# Altium PCB BLDC-2020_REMOTE_2544.PcbDoc (part 3 of 3)
Units mil, origin at the board's own origin, x right, y up, seen from the top; angles counter-clockwise.
Board outline 3000 x 7500 mil, 4 copper layers (Top Layer, GND, Power, Bottom Layer), stack 26.468 mil thick; 190 components, 136 nets, 675 pads, 43 vias.
Unrouted connection lines stored in the file: 286.
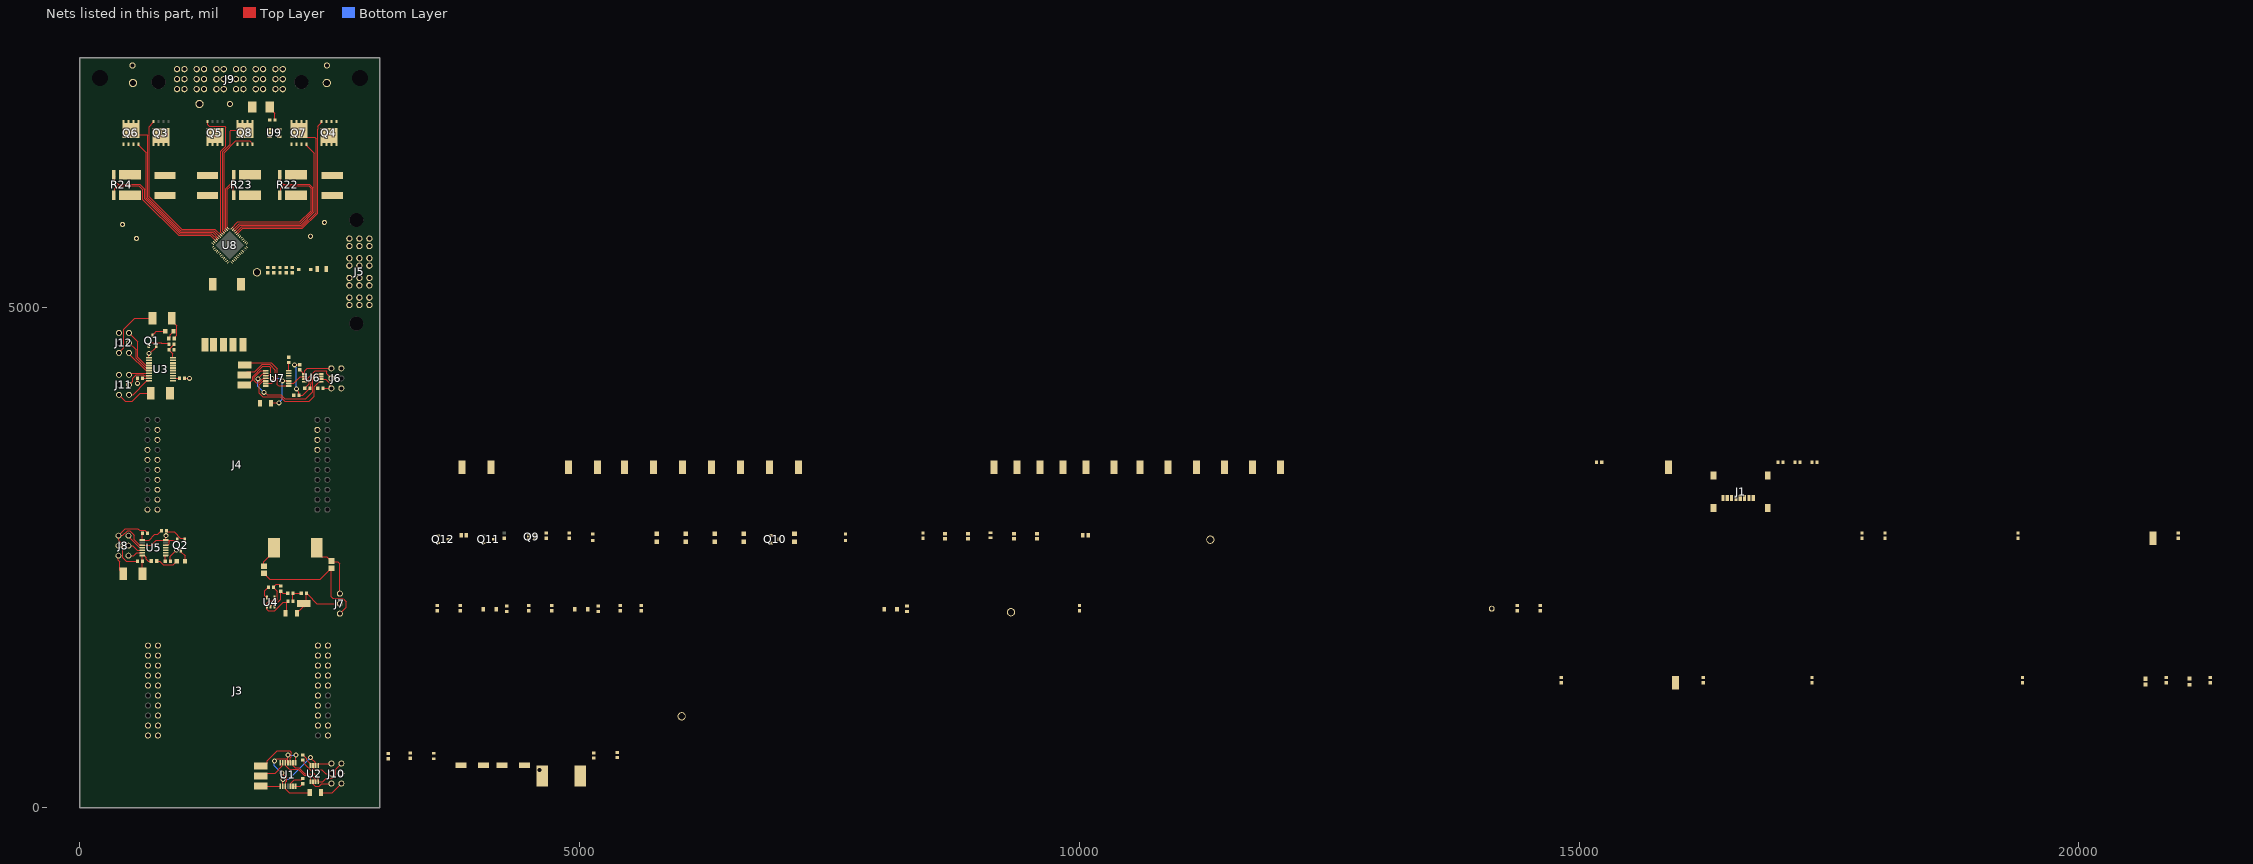
[diagram p3: the nets of this part, all layers, seen from the top]

## Part data (continued)
Q9: library part CMP-1259-00353-1, "N/P-Channel Trench MOSFET, 30 / -30 V, 400 / -220 mA, -55 to 150 degC, 6-Pin SOT666, Tape and Reel", Manufacturer="NXP Semiconductors", Automotive Qualified=Y, Channel Type=N/P, ComponentLink1Description="Manufacturer URL", ComponentLink1URL=http://www.nxp.com/, ComponentLink2Description=Datasheet, ComponentLink2URL=http://www.nxp.com/documents/data_sheet/NX3008CBKV.pdf, ComponentLink3Description="Package Specification", ComponentLink3URL=http://www.nxp.com/documents/outline_drawing/sot666_po.pdf, DatasheetVersion="Rev. 1", Mounting Technology="Surface Mount", PackageDescription="6-Pin Small Outline Transistor Package, Body 1.6 x 1.2 mm, Pitch 0.5 mm", PackageReference=SOT666, PackageVersion="06-03-16, 03/2006", Packing="Tape & Reel", PartNumber=NX3008CBKV,115
Q10: library part CMP-1058-00754-1, "Trench Power MOSFET, -20 V, Single P-Channel, 3-Pin SOT-23, Pb-Free, Tape and Reel", Manufacturer="On Semiconductor", Package Type=SOT-23-3, Channel Polarity="P Channel", Ciss Typ (pF)=675, ComponentLink1Description="Manufacturer URL", ComponentLink1URL=http://www.onsemi.com/, ComponentLink2Description=Datasheet, ComponentLink2URL=http://www.onsemi.cn/pub_link/Collateral/NTR4101P-D.PDF, ComponentLink3Description="Package Specification", ComponentLink3URL=http://www.onsemi.cn/pub_link/Collateral/318-08.PDF, Configuration=Single, Coss Typ (pF)=100, Crss Typ (pF)=75, DatasheetVersion="Rev. 9", ID Max (A)=3.2, Mounting Technology="Surface Mount", PackageDescription="3-Pin Small Outline Transistor, Body 2.92 x 1.3 mm, Pitch 0.95 mm", PackageReference=SOT-23-3-318-08, PackageVersion="Rev. AP, 11/2009", Packing="Tape and Reel", PartNumber=NTR4101PT1G, Qrr Typ (nC)=1008, RoHS=Pb-Free, V(BR)DSS Min (V)=20, VGS(th) Max (V)=1.2, VGS Max (V)=8
R1 R11 R17: library part CMP-2100-03681-1, "Chip Resistor, 0 Ohm, +/- 5%, -55 to 155 degC, 1206 (3216 Metric), RoHS, Tape and Reel", Case/Package=1206, Case Code (Metric)=3216, Manufacturer=Yageo, Max Operating Temperature=155degC, Max Power Dissipation=250mW, Min Operating Temperature=-55degC, Package Description="2-Pin Surface Mount Device, Body 3.1 x 1.6 mm", Package Quantity=5000, Package Reference=1206.0, Resistance=0mOhm, Temperature Coefficient=200ppm/degreesC, Tolerance=5%, Voltage Rating=200V, Case Code (Imperial)=1206, Composition=CarbonFilm, Contact Plating=Tin, Datasheet URL=http://www.yageo.com/documents/recent/PYu-RC_Group_51_RoHS_L_5.pdf, Datasheet Version="Rev. 5, 10/2016", Depth=1.6mm, Height=0.026inch, Lead Free=LeadFree, Length=3.1mm, Manufacturer URL=http://www.yageo.com/, Military Standard=Not, Number of Terminations=2, Packaging=TapeandReel, Power Rating=250mW, Radiation Hardening=No, REACH SVHC=Unknown, RoHSCompliant=true, Termination=SMD/SMT, Width=0.063inch
R2 R10 R34 R35 R37 R38: library part CMP-2000-01951-1, Manufacturer=Susumu, Part Number=RG1608N-910-B-T5
R3 R13 R39 R40 R41 R42: library part RR0816P-101-D, "RES SMD 100 OHM 0.5% 1/16W 0816", Case/Package=0603, Case Code (Metric)=1608, Manufacturer=Susumu, Max Operating Temperature=125°C, Max Power Dissipation=63mW, Min Operating Temperature=-55°C, Package Quantity=1, Resistance=100R, Temperature Coefficient=25ppm/°C, Tolerance=0.5%, Voltage Rating=75V, Case Code (Imperial)=0603, ComponentLink1Description=http://www.susumu.co.jp/common/pdf/n_catalog_partition05_en.pdf, ComponentLink1URL=http://www.susumu.co.jp/common/pdf/n_catalog_partition05_en.pdf, ComponentLink2Description=http://documents.rs-components.com/techlib://itc_doclist_GB.htm?stockno=3915191, ComponentLink2URL=http://documents.rs-components.com/techlib://itc_doclist_GB.htm?stockno=3915191, Composition="Thin Film", Depth=0.8mm, Height=0.4mm, Lead Free="Lead Free", Length=1.6mm, Manufacturer Part Number=RR0816P-101-D, Number of Pins=2, Number of Terminations=2, Packaging="Cut Tape", Power Rating=63mW, Pricing 1="1 = 0.11000, 10 = 0.09800, 100 = 0.03760, 1000 = 0.01654, 2500 = 0.01428 (USD)", REACH SVHC=Unknown, RoHS=Yes, Stock 1=167672, Supplier 1=Digi-Key, Termination=SMD/SMT, Voltage Rating (DC)=75V, Weight=7.1E-05oz, Width=0.031inch
R4 R5 R12 R14 R15 R16 R18 R19 R20 R21 R26 R47 R48: library part RR0816P-103-D, "RES SMD 10K OHM 0.5% 1/16W 0816", Case/Package=0603, Case Code (Metric)=1608, Manufacturer=Susumu, Max Operating Temperature=125°C, Max Power Dissipation=63mW, Min Operating Temperature=-55°C, Package Quantity=1, Resistance=10kR, Temperature Coefficient=25ppm/°C, Tolerance=0.5%, Voltage Rating=75V, Case Code (Imperial)=0603, ComponentLink1Description=http://documents.rs-components.com/techlib://itc_doclist_GB.htm?stockno=3915321, ComponentLink1URL=http://documents.rs-components.com/techlib://itc_doclist_GB.htm?stockno=3915321, ComponentLink2Description=http://www.susumu.co.jp/common/pdf/n_catalog_partition05_en.pdf, ComponentLink2URL=http://www.susumu.co.jp/common/pdf/n_catalog_partition05_en.pdf, Composition="Thin Film", Depth=0.8mm, Height=0.4mm, Lead Free="Lead Free", Length=1.6mm, Manufacturer Part Number=RR0816P-103-D, Number of Pins=2, Number of Terminations=2, Packaging="Tape and Reel", Power Rating=63mW, Pricing 1="1=0.11, 10=0.098, 100=0.0376, 1000=0.01654, 2500=0.01428 (USD)", REACH SVHC=Unknown, Stock 1=1031099, Supplier 1=Digi-Key, Termination=SMD/SMT, Voltage Rating (DC)=75V, Weight=7.1E-05oz, Width=0.8mm
R6 R7 R28: library part CR0603-JW-104ELF, "BOURNS - CR0603-JW-104ELF - RES, 100K, 5%, 0.1W, 0603, THICK FILM", Case/Package=0603, Case Code (Metric)=1608, Manufacturer 1=Bourns, Max Operating Temperature=155°C, Min Operating Temperature=-55°C, Package Quantity=5000, Power Rating=100mW, Resistance=100kR, Temperature Coefficient=200ppm/°C, Tolerance=5%, Voltage Rating=50V, Case Code (Imperial)=0603, ComponentLink1Description=https://datasheet.ciiva.com/22713/691949-22713239.pdf?src-supplier=Element14, ComponentLink1URL=https://datasheet.ciiva.com/22713/691949-22713239.pdf?src-supplier=Element14, ComponentLink2Description=https://datasheet.ciiva.com/23776/1902866-23776391.pdf?src-supplier=Newark, ComponentLink2URL=https://datasheet.ciiva.com/23776/1902866-23776391.pdf?src-supplier=Newark, ComponentLink3Description=https://datasheet.ciiva.com/16766/70154685-16766760.pdf?src-supplier=Allied+Electronics, ComponentLink3URL=https://datasheet.ciiva.com/16766/70154685-16766760.pdf?src-supplier=Allied+Electronics, ComponentLink4Description=https://datasheet.ciiva.com/9120/chpreztr-9120764.pdf?src-supplier=Avnet, ComponentLink4URL=https://datasheet.ciiva.com/9120/chpreztr-9120764.pdf?src-supplier=Avnet, ComponentLink5Description=https://datasheet.ciiva.com/46383/1791942-46383790.pdf?src-supplier=Element14, ComponentLink5URL=https://datasheet.ciiva.com/46383/1791942-46383790.pdf?src-supplier=Element14, ComponentLink6Description=https://datasheet.ciiva.com/30229/159chpreztr-30229129.pdf?src-supplier=Onlinecomponents.com, ComponentLink6URL=https://datasheet.ciiva.com/30229/159chpreztr-30229129.pdf?src-supplier=Onlinecomponents.com, ComponentLink7Description=https://datasheet.ciiva.com/16935/chpreztr-16935963.pdf?src-supplier=Avnet+Europe, ComponentLink7URL=https://datasheet.ciiva.com/16935/chpreztr-16935963.pdf?src-supplier=Avnet+Europe, ComponentLink8Description=https://datasheet.ciiva.com/5543/chpreztr-5543676.pdf?src-supplier=Mouser, ComponentLink8URL=https://datasheet.ciiva.com/5543/chpreztr-5543676.pdf?src-supplier=Mouser, ComponentLink9Description=https://datasheet.ciiva.com/48692/001055501-da-01-en-smd-wid-cr0603-jw-104elf-100k-ohm-1-10w-48692133.pdf?src-supplier=Conrad, ComponentLink9URL=https://datasheet.ciiva.com/48692/001055501-da-01-en-smd-wid-cr0603-jw-104elf-100k-ohm-1-10w-48692133.pdf?src-supplier=Conrad, Composition="Thick Film", Contact Plating=Tin, Depth=0.8mm, Height=0.45mm, Length=1.6mm, Manufacturer Part Number 1=CR0603-JW-104ELF, Military Standard=Not, Mount="Surface Mount", Number of Pins=2, Packaging="Tape and Reel", Pricing 1="1=0.10000, 10=0.01500, 25=0.01080, 50=0.00840, 100=0.00610, 250=0.00468, 500=0.00374, 1000=0.00275 (USD)", Radiation Hardening=No, REACH SVHC="No SVHC", RoHS=Yes, Stock 1=49390, Supplier 1=Digi-Key, Termination=SMD/SMT, Thickness=457um, Voltage Rating (DC)=50V, Width=0.8mm, Working Voltage=50V
R8: library part CR0603-FX-1912ELF, "RES SMD 19.1K OHM 1% 1/10W 0603", Case/Package=0603, Case Code (Metric)=1608, Manufacturer 1=Bourns, Max Operating Temperature=155°C, Max Power Dissipation=100mW, Min Operating Temperature=-55°C, Package Quantity=5000, Resistance=19.1kR, Temperature Coefficient=100ppm/°C, Tolerance=1%, Voltage Rating=50V, Case Code (Imperial)=0603, ComponentLink1Description=https://datasheet.ciiva.com/5549/chpreztr-5549702.pdf?src-supplier=Mouser, ComponentLink1URL=https://datasheet.ciiva.com/5549/chpreztr-5549702.pdf?src-supplier=Mouser, ComponentLink2Description=https://datasheet.ciiva.com/9121/chpreztr-9121960.pdf?src-supplier=Avnet, ComponentLink2URL=https://datasheet.ciiva.com/9121/chpreztr-9121960.pdf?src-supplier=Avnet, Composition="Thick Film", Contact Plating=Tin, Depth=0.8mm, Features="Moisture Resistant", Height=0.022inch, Length=1.6mm, Manufacturer Part Number 1=CR0603-FX-1912ELF, Military Standard=Not, Mount="Surface Mount", Number of Terminations=2, Packaging="Tape and Reel", Power Rating=100mW, Pricing 1="1=0.10000, 10=0.02000, 100=0.00820, 1000=0.00367, 2500=0.00319 (USD)", Radiation Hardening=No, RoHS=Yes, Stock 1=78916, Supplier 1=Digi-Key, Termination=SMD/SMT, Thickness=457um, Width=0.031inch
R9: library part RC0603FR-07536KL, "RES SMD 536K OHM 1% 1/10W 0603", Case/Package=0603, Case Code (Metric)=1608, Manufacturer 1=Yageo, Max Operating Temperature=155°C, Min Operating Temperature=-55°C, Power Rating=100mW, Resistance=536kR, Temperature Coefficient=100ppm/°C, Tolerance=1%, Voltage Rating=50V, Case Code (Imperial)=0603, ComponentLink1Description=https://datasheet.ciiva.com/8885/pyu-rc0603-51-rohs-l-4-8885383.pdf?src-supplier=Avnet, ComponentLink1URL=https://datasheet.ciiva.com/8885/pyu-rc0603-51-rohs-l-4-8885383.pdf?src-supplier=Avnet, ComponentLink2Description=https://datasheet.ciiva.com/12558/rc0603-272842-12558314.pdf?src-supplier=Mouser, ComponentLink2URL=https://datasheet.ciiva.com/12558/rc0603-272842-12558314.pdf?src-supplier=Mouser, ComponentLink3Description=https://datasheet.ciiva.com/28389/pyu-rc0603-51-rohs-l-4-28389818.pdf?src-supplier=Avnet+Europe, ComponentLink3URL=https://datasheet.ciiva.com/28389/pyu-rc0603-51-rohs-l-4-28389818.pdf?src-supplier=Avnet+Europe, Composition="Thick Film", Contact Plating=Tin,Matte, Height=0.45mm, Lead Free="Lead Free", Length=1.6mm, Manufacturer Part Number 1=RC0603FR-07536KL, Packaging="Tape and Reel", Pricing 1="1=0.10000, 10=0.02400, 100=0.00970, 1000=0.00437, 2500=0.00379 (USD)", RoHS=Yes, Stock 1=45136, Supplier 1=Digi-Key, Termination=SMD/SMT, Voltage Rating (DC)=50V, Width=0.8mm
R22 R23 R24: library part WSL27262L000FEB, "RES SMD 2 MOHM 1% 3W 2726", Case/Package=2726, Case Code (Metric)=6966, Manufacturer 1="Vishay Dale", Max Operating Temperature=170°C, Min Operating Temperature=-65°C, Package Quantity=1000, Power Rating=3W, Resistance=2mR, Temperature Coefficient=75ppm/°C, Tolerance=1%, Case Code (Imperial)=2726, ComponentLink1Description=http://www.mouser.com/ds/2/427/wsl2726-88189.pdf?src-supplier=Mouser, ComponentLink1URL=http://www.mouser.com/ds/2/427/wsl2726-88189.pdf?src-supplier=Mouser, ComponentLink2Description=https://media.digikey.com/pdf/Data%20Sheets/Vishay%20Dale%20PDFs/WSL_C_N_F_H_R_Series_EB_Pkg.pdf?src-supplier=Digi-Key, ComponentLink2URL=https://media.digikey.com/pdf/Data%20Sheets/Vishay%20Dale%20PDFs/WSL_C_N_F_H_R_Series_EB_Pkg.pdf?src-supplier=Digi-Key, ComponentLink3Description=http://www.vishay.com/docs/30131/wsl2726.pdf?src-supplier=Digi-Key, ComponentLink3URL=http://www.vishay.com/docs/30131/wsl2726.pdf?src-supplier=Digi-Key, Composition="Metal Strip", Height=3mm, Length=6.9mm, Manufacturer Part Number 1=WSL27262L000FEB, Packaging="Tape and Reel", Pricing 1="1=2.51000, 10=2.22300, 25=2.06160, 50=1.94040, 100=1.69790, 250=1.45532, 500=1.21276 (USD)", RoHS=Yes, Stock 1=5164, Supplier 1=Digi-Key, Termination=SMD/SMT, Width=6.6mm
R25: library part RC0603JR-07470RL, "RES SMD 470 OHM 5% 1/10W 0603", Case/Package=0603, Case Code (Metric)=1608, Manufacturer=Yageo, Max Operating Temperature=155°C, Max Power Dissipation=100mW, Min Operating Temperature=-55°C, Package Quantity=1, Resistance=470R, Temperature Coefficient=100ppm/°C, Tolerance=5%, Voltage Rating=50V, Case Code (Imperial)=0603, ComponentLink1Description=http://www.yageo.com/documents/recent/PYu-RC_Group_51_RoHS_L_10.pdf, ComponentLink1URL=http://www.yageo.com/documents/recent/PYu-RC_Group_51_RoHS_L_10.pdf, ComponentLink2Description=http://www.farnell.com/datasheets/443971.pdf, ComponentLink2URL=http://www.farnell.com/datasheets/443971.pdf, Composition="Thick Film", Depth=0.8mm, Features="Moisture Resistant", Height=0.022inch, Lead Free="Lead Free", Length=0.063inch, Manufacturer Part Number=RC0603JR-07470RL, Military Standard=Not, Number of Pins=2, Number of Terminations=2, Packaging="Tape and Reel", Power Rating=100mW, Pricing 1="1 = 0.10000, 10 = 0.02000, 100 = 0.00810, 1000 = 0.00362, 2500 = 0.00314 (USD)", REACH SVHC="No SVHC", RoHS=Yes, Stock 1=12870080, Supplier 1=Digi-Key, Termination=SMD/SMT, Voltage Rating (DC)=50V, Width=0.031inch
R29 R49: library part RMCF0603FT28K0, "RES SMD 28K OHM 1% 1/10W 0603", Case/Package=0603, Case Code (Metric)=1608, Manufacturer 1="Stackpole Electronics", Max Operating Temperature=155°C, Max Power Dissipation=100mW, Min Operating Temperature=-55°C, Resistance=28kR, Temperature Coefficient=100ppm/°C, Tolerance=1%, Case Code (Imperial)=0603, ComponentLink1Description=https://www.seielect.com/Catalog/SEI-RMCF_RMCP.pdf?src-supplier=Digi-Key, ComponentLink1URL=https://www.seielect.com/Catalog/SEI-RMCF_RMCP.pdf?src-supplier=Digi-Key, ComponentLink2Description=https://www.seielect.com/catalog/SEI-Packaging.pdf?src-supplier=Digi-Key, ComponentLink2URL=https://www.seielect.com/catalog/SEI-Packaging.pdf?src-supplier=Digi-Key, ComponentLink3Description=http://components.arrow.com/part/dataview/50505137S2698N1174?src-supplier=Arrow, ComponentLink3URL=http://components.arrow.com/part/dataview/50505137S2698N1174?src-supplier=Arrow, ComponentLink4Description=https://www.seielect.com/catalog/SEI-RMCF_RMCP.pdf?src-supplier=Avnet, ComponentLink4URL=https://www.seielect.com/catalog/SEI-RMCF_RMCP.pdf?src-supplier=Avnet, ComponentLink5Description=http://www.seielect.com/Catalog/SEI-RMC.pdf?src-supplier=Future+Electronics, ComponentLink5URL=http://www.seielect.com/Catalog/SEI-RMC.pdf?src-supplier=Future+Electronics, Composition="Thick Film", Contact Plating=Tin,Matte, Features="Automotive AEC-Q200", Height=0.022inch, Lead Free="Lead Free", Length=0.061inch, Manufacturer Part Number 1=RMCF0603FT28K0, Mount="Surface Mount", Number of Terminations=2, Packaging="Tape and Reel", Power Rating=100mW, Pricing 1="1=0.10000, 10=0.01700, 100=0.00680, 1000=0.00306, 2500=0.00266 (USD)", Radiation Hardening=No, RoHS=Yes, Stock 1=126187, Supplier 1=Digi-Key, Width=0.031inch
R30: library part CMP-2000-04152-1, Manufacturer=Yageo, Part Number=RC0603FR-0788K7L
R31: library part RC0603FR-078K45L, "RES SMD 8.45K OHM 1% 1/10W 0603", Case/Package=Molded, Case Code (Imperial)=0603, Case Code (Metric)=1608, Manufacturer 1=Yageo, Max Operating Temperature=155°C, Min Operating Temperature=-55°C, Power Rating=100mW, Resistance=8.45kR, Temperature Coefficient=100ppm/°C, Tolerance=1%, Voltage Rating=50V, ComponentLink1Description=http://www.mouser.com/ds/2/447/RC0603-272842.pdf?src-supplier=Mouser, ComponentLink1URL=http://www.mouser.com/ds/2/447/RC0603-272842.pdf?src-supplier=Mouser, ComponentLink2Description=http://components.arrow.com/part/dataview/0323_03543311?src-supplier=Arrow+Europe, ComponentLink2URL=http://components.arrow.com/part/dataview/0323_03543311?src-supplier=Arrow+Europe, ComponentLink3Description=https://www.verical.com/server-webapp/html/getDatasheet?partID=329317&src-supplier=Verical, ComponentLink3URL=https://www.verical.com/server-webapp/html/getDatasheet?partID=329317&src-supplier=Verical, ComponentLink4Description=http://www.yageo.com/documents/recent/PYu-RC_Group_51_RoHS_L_9.pdf?src-supplier=Digi-Key, ComponentLink4URL=http://www.yageo.com/documents/recent/PYu-RC_Group_51_RoHS_L_9.pdf?src-supplier=Digi-Key, ComponentLink5Description=http://www.yageo.com/documents/recent/PYu-RC0603_51_RoHS_L_7.pdf?src-supplier=Future+Electronics, ComponentLink5URL=http://www.yageo.com/documents/recent/PYu-RC0603_51_RoHS_L_7.pdf?src-supplier=Future+Electronics, Composition="Thick Film", Depth=0.8mm, Lead Free="Lead Free", Length=1.6mm, Manufacturer Part Number 1=RC0603FR-078K45L, Military Standard=Not, Packaging="Tape and Reel", Pricing 1="1=0.10000, 10=0.02400, 100=0.00970, 1000=0.00437, 2500=0.00379 (USD)", RoHS=Yes, Stock 1=1203753, Supplier 1=Digi-Key, Termination=SMD/SMT, Voltage Rating (DC)=50V
R32: library part CMP-2000-00342-1, Manufacturer=Panasonic, Part Number=ERJ-3EKF2212V
R33 R43: library part CMP-2000-03356-1, Manufacturer="Vishay Dale", Part Number=CRCW060343R0JNEA
R36: library part CMP-2000-00986-1, Manufacturer="KOA Speer", Part Number=RK73B1JTTD431J
R50 R52 R54: library part CMP-2000-00697-1, Manufacturer=Panasonic, Part Number=ERJ-3EKF9762V
R51 R53 R55: library part RT0603BRD074K99L, "RES SMD 4.99K OHM 0.1% 1/10W", Case/Package=0603, Case Code (Metric)=1608, Manufacturer 1=Yageo, Max Operating Temperature=125°C, Max Power Dissipation=100mW, Min Operating Temperature=-55°C, Package Quantity=5000, Resistance=4.99kR, Temperature Coefficient=25ppm/°C, Tolerance=0.1%, Voltage Rating=75V, Voltage Rating (DC)=50V, Case Code (Imperial)=0603, ComponentLink1Description=https://datasheet.ciiva.com/2585/pyu-rt-1-to-0-05-rohs-l-4-2585984.pdf?src-supplier=Digi-Key, ComponentLink1URL=https://datasheet.ciiva.com/2585/pyu-rt-1-to-0-05-rohs-l-4-2585984.pdf?src-supplier=Digi-Key, ComponentLink2Description=https://datasheet.ciiva.com/46635/pyu-rt-1-to-0-05-rohs-l-5-46635030.pdf?src-supplier=Digi-Key, ComponentLink2URL=https://datasheet.ciiva.com/46635/pyu-rt-1-to-0-05-rohs-l-5-46635030.pdf?src-supplier=Digi-Key, ComponentLink3Description=https://datasheet.ciiva.com/12836/pyu-rt-1-to-0-05-rohs-l-4-12836462.pdf?src-supplier=Mouser, ComponentLink3URL=https://datasheet.ciiva.com/12836/pyu-rt-1-to-0-05-rohs-l-4-12836462.pdf?src-supplier=Mouser, Composition="Thin Film", Contact Plating=Tin,Matte, Depth=0.8mm, Features="Moisture Resistant", Height=0.022inch, Lead Free="Lead Free", Length=1.6mm, Manufacturer Part Number 1=RT0603BRD074K99L, Military Standard=Not, Number of Terminations=2, Packaging="Tape and Reel", Power Rating=100mW, Pricing 1="1=0.37000, 10=0.31200, 100=0.12190, 1000=0.05103, 2500=0.04678 (USD)", Radiation Hardening=No, RoHS=Yes, Stock 1=53078, Supplier 1=Digi-Key, Termination=SMD/SMT, Weight=7.1E-05oz, Width=0.031inch
TP1 TP2 TP3 TP4 TP5 TP6 TP7 TP8 TP9 TP10 TP11 TP12 TP13 TP14 TP15 TP16 TP17 TP18 TP19 TP20 TP21 TP22 TP23 TP24 TP25 TP26 TP27 TP28 TP29 TP30 TP31 TP32 TP33 TP34 TP38 TP39 TP40 TP41: library part CMP-2000-05183-1, "Test Point, White, SMT", Manufacturer=Keystone, Contact Plating=Silver, Datasheet URL=https://datasheet.ciiva.com/1123/5015-1123862.pdf, Datasheet Version=Mar-14, Finish Plating=SilverPlate, Height=0.06In., Length="0.105\"(2.667mm)", Manufacturer URL=http://www.keyelco.com/, Material=PhosphorBronze, Material, Contact=PhosphorBronze, Mounting=SurfaceMount, Mounting Type=SurfaceMount, Primary Type=PCBTestPoints, Style=Miniature, Termination=SMT, Thickness=0.010In., Type=TestPointsonTapeandReel
TP35 TP36 TP37: library part CMP-2000-05182-1, "Test Point, White, 1-Pin THD, RoHS, Bulk", Color=White, Manufacturer=KeystoneElectronics, Brand=KeystoneElectronics, Contact Material=PhosphorBronze, Datasheet URL=https://ciiva.com/datasheet-click-2917627?src=ciiva&sig=bd195616, Datasheet Version="Rev. G, 12/2008", Length=7.62mm, Manufacturer URL=http://www.keyelco.com/, Material=Nylon, Mounting Hole Size=1mm, Outside Diameter=2.54mm, Packaging=Bulk, Plating=Silver, Product=TestPoints, Product Category=CircuitBoardHardware-PCB, RoHS=True, Type=Miniature
TP42 TP43 TP44 TP47 TP48 TP50: library part CMP-1672-00003-4, "Test Point, Black, Through Hole, RoHS, Bulk", Colour=Black, Manufacturer=Keystone, Package Quantity=100, ComponentLink1Description="Manufacturer URL", ComponentLink1URL=http://www.keyelco.com/, ComponentLink2Description=Datasheet, ComponentLink2URL=http://www.keyelco.com/product-pdf.cfm?p=1320, Contact Material=Bronze, Contact Plating=Silver, DatasheetVersion="Rev. F, 12/2013", Height="8.12 mm", Mount="Through Hole", Mounting Technology="Through Hole", PackageDescription="1-Pin Through Hole Device, Dia 3.17 mm", PackageReference=5011, Packaging=Bulk, Pins=1, REACH SVHC="No SVHC", RoHSCompliant=true
TP45: library part CMP-1672-00005-4, "Test Point, Orange, Through Hole, RoHS, Bulk", Colour=Orange, Manufacturer=Keystone, Package Quantity=100, ComponentLink1Description="Manufacturer URL", ComponentLink1URL=http://www.keyelco.com/, ComponentLink2Description=Datasheet, ComponentLink2URL=http://www.keyelco.com/product-pdf.cfm?p=1322, Contact Material=Bronze, Contact Plating=Silver, DatasheetVersion="Rev. F, 12/2013", Height="8.12 mm", Mount="Through Hole", Mounting Technology="Through Hole", PackageDescription="1-Pin Through Hole Device, Dia 3.17 mm", PackageReference=5013, Packaging=Bulk, REACH SVHC="No SVHC", RoHSCompliant=True
TP46: library part CMP-2000-05575-1, "Test Point, Yellow, 1-Pin THD, RoHS, Bulk", Manufacturer=Keystone, Package Description="1-Pin Through Hole Device, Dia 2.54 mm", Datasheet URL=http://www.keyelco.com/product-pdf.cfm?p=1313, Datasheet Version="Rev. G, 12/2008", Manufacturer URL=http://www.keyelco.com/, Mounting Technology=ThroughHole, Package Reference=5004
TP49: library part CMP-1672-00009-1, "Test Point, Orange, 1-Pin THD, RoHS", Forward Current="3 A", Forward Voltage="1.08 V", Max Operating Temperature="150 degC", Max Surge Current="80 A", Min Operating Temperature="-65 degC", Package Quantity=500, Peak Reverse Current="600 uA", ComponentLink1Description="Manufacturer URL", ComponentLink1URL=http://www.keyelco.com/, ComponentLink2Description=Datasheet, ComponentLink2URL=http://keyelco.com/userAssets/file/M65p56.pdf, DatasheetVersion=Jun-15, Diameter="5.3 mm", Height="0.25 inch", Length="9.5 mm", Mount="Through Hole", PackageDescription="1-Pin Through Hole Device, Dia 2.54 mm", PackageReference=5003, Packaging=Bulk, Pins=2, Radiation Hardening=No, REACH SVHC="No SVHC", RoHSCompliant=true, Weight="0.01 lb", Width="0.25 inch"
U1 U7: library part CMP-0859-00971-3, "Single Power Supply Quadruple Buffer GATE w/ 3-State Output CMOS Logic Level Shifter, PW0014A, LARGE T&R", F @ Nom Voltage(Max)(Mhz)=50, Generic Part Number=SN74LV4T125, ICC @ Nom Voltage(Max)(mA)=0.02, Manufacturer="Texas Instruments", Operating Temperature Range(C)="-40 to 125", Rating=Catalog, tpd @ Nom Voltage(Max)(ns)=12,7,5.5,3.5, Voltage(Nom)(V)=1.8,2.5,3.3,5, 3-State Output=Yes, Bits(#)=4, DatasheetVersion=SCLS749B, Input Type=CMOS/TTL, Logic=True, Output Drive (IOL/IOH)(Max)(mA)=16/-16, Output Type=CMOS, PackageReference=PW0014A, Schmitt Trigger=No, Sub-Family="Single Supply Translator", Technology Family=LV-A, VCC(Max)(V)=5.5, VCC(Min)(V)=1.6
U2 U6: library part CMP-0859-00525-4, "TRIPLE SCHMITT-TRIGGER BUFFER, DCT0008A, LARGE T&R", F @ Nom Voltage(Max)(Mhz)=150, Generic Part Number=SN74LVC3G17, ICC @ Nom Voltage(Max)(mA)=0.01, Manufacturer="Texas Instruments", Operating Temperature Range(C)="-40 to 125,-40 to 85", Rating=Catalog, tpd @ Nom Voltage(Max)(ns)=9.2,6.2,5.4,4.1, Voltage(Nom)(V)=1.8,2.5,3.3,5, 3-State Output=No, Bits(#)=3, DatasheetVersion=SCES470E, Input Type=CMOS/TTL, Logic=True, Output Drive (IOL/IOH)(Max)(mA)=32/-32, Output Type=CMOS, PackageReference=DCT0008A, Schmitt Trigger=Yes, Sub-Family="Non-Inverting Buffer/Driver", Technology Family=LVC, VCC(Max)(V)=5.5, VCC(Min)(V)=1.65
U3: library part CMP-2000-04956-1, "Bidirectional Voltage-Level Translator for Open-Drain and Push-Pull Application, 8 bit, 1.2 to 3.6 V, -40 to 85 degC, 20-Pin TSSOP, Green (RoHS & no Sb/Br), Tape and Reel", Logic Case Style=TSSOP, Manufacturer="Texas Instruments", Operating Temperature Max=85degC, Operating Temperature Min=-40degC, Output Current=620µA, Supply Voltage Max=5.5V, Supply Voltage Min=1.2V, Datasheet URL=https://datasheet.ciiva.com/14287/txs0108e-14287280.pdf, Datasheet Version="Rev. B, 09/2008", Logic Type=VoltageLevelTranslator, Manufacturer URL=http://www.ti.com/, MSL=MSL1-Unlimited, No. of Inputs=8, No. of Pins=20, Packaging=CutTape, Propagation Delay=4.8ns, SVHC=NoSVHC(16-Jun-2014)
U4: library part CMP-0359-01946-2, "Single Channel, Low Noise, CMOS Operational Amplifier, RRO, 18 MHz Typical GBW, 10 V/us Typical SR, 2.8 to 6 V, 5-Pin SOT23 (S5-5), Commercial, Pb-Free, Mini Reel", Linear Technology Part Number=LTC6240, Manufacturer="Linear Technology", PartNumber=LTC6240CS5#TRMPBF, Channels (#)=1, Code_JEDEC=MO-193, ComponentLink1Description="Manufacturer URL", ComponentLink1URL=http://www.linear.com/, ComponentLink2Description=Datasheet, ComponentLink2URL=http://cds.linear.com/docs/en/datasheet/624012fe.pdf, ComponentLink3Description="Package Specification", ComponentLink3URL=http://cds.linear.com/docs/en/packaging/SOT_5_05-08-1635.pdf, DatasheetVersion="Rev. E", GBW (MHz) Typical=18, Is (mA) Typical=2, Mounting Technology="Surface Mount", PackageDescription="5-Lead Plastic TSOT-23, Body 1.63 x 2.90 mm, Pitch 0.95 mm", PackageReference=LT-S5-5-TSOT-23, Packing="Mini Reel", RevisionNote="URLs updated", RoHS=Pb-Free, SR (V/us) Typical=10, Type=VFB, Vos (mV) Typical=0.04, Vs Max (V)=6, Vs Min (V)=2.8
U5: library part CMP-2000-07335-1, "4-Bit Bidirectional Voltage-Level Translator with Automatic Direction Sensing and +/- 15-kV ESD Protection, -40 to 85 degC, 14-Pin TSSOP (PW), Green (RoHS & Sb/Br), Tape and Reel", Manufacturer="Texas Instruments", Operating Temperature=-40°C~85°C, Package / Case="14-TSSOP(0.173\",4.40mmWidth)", Package Description="14-Pin Thin Shrink Small Outline Package, Body 5 x 4.4 mm, Pitch 0.65 mm", Package Reference=PW14, Standard Package=1, Supplier Device Package=14-TSSOP, Voltage - Supply=1.2V~3.6V,1.65V~5.5V, Category=IntegratedCircuits(ICs), Data Rate=100Mbps, Datasheet URL=http://www.ti.com/general/docs/lit/getliterature.tsp?genericPartNumber=TXB0104&fileType=pdf, Datasheet Version="Rev. G, 11/2014", Differential - Input=Output:No/No, Dynamic Catalog=TXBSeries, Family=Logic-Translators, Input Type=Logic, Logic Function=Translator,Bidirectional, Manufacturer URL=http://www.ti.com/, Mounting Technology=SurfaceMount, Number of Bits=4, Number of Channels=4, Number of Outputs/Channel=1, Other Names=296-21929-6, Output Type=Logic, Packaging=Digi-Reel®, Product Training Modules=VoltageLevelTranslation, Propagation Delay (Max)=4ns, Series=-
U8: "IC 3PHASE GATE DRIVER 48VQFN", Manufacturer="Texas Instruments", Max Operating Temperature=125°C, Min Operating Temperature=-40°C, ComponentLink1Description=http://www.ti.com/lit/ds/symlink/drv8323r.pdf?src-supplier=Digi-Key, ComponentLink1URL=http://www.ti.com/lit/ds/symlink/drv8323r.pdf?src-supplier=Digi-Key, Manufacturer 2="Texas Instruments", Manufacturer Part Number=DRV8323RSRGZR, Manufacturer Part Number 2=DRV8323RSRGZR, Pricing 1="1=4.44, 10=3.991, 100=3.2698, 500=2.78356, 1000=2.34758 (USD)", Pricing 2="1=4.44000, 10=3.99100, 100=3.26980, 500=2.78356, 1000=2.34758 (USD)", RoHS=No, Stock 1=5951, Stock 2=7391, Supplier 1=Digi-Key, Supplier 2=Digi-Key
U9: library part CMP-0192-00172-1, "Thermal Sensor with SPI Interface, 5-Pin SOT-23, -55°C to +125°C Temperature, Tape and Reel", Code_IPC=SOT23-5, DatasheetVersion="revA, Aug-2002", PackageDescription="5-Lead Plastic Small Outline Transistor (CT) [SOT-23]", PackageReference=SOT-23-CT5, PackageVersion="revBB, Aug-2009"

## Free pads (board coordinates)
  round 150 hole 160: 5(200,7300) 5(2800,7300)

## Via types
v1: diameter 19.68, hole 7.87, Top Layer to Bottom Layer, 25 vias
v2: diameter 50, hole 28, Top Layer to Bottom Layer, 18 vias

## Nets (pads, with @x,y where several pads share a name; then routed paths per layer and width w, separated by ;. In a path a pad name is that pad's centre, name@x,y a point inside that pad or via, vN(x,y) a via of type N, cw(c..) or ccw(c..) an arc to the next point about the centre after c; other vN are vias at no path point)
3.3V: C1.2 C3.2 C5.1 C6.2 C10.2 C12.2 C22.2 C29.2 C36.2 J1.4 J3.1 L1.2 L3.1 Q9.3 Q12.G R5.2 R6.2 R7.2 R19.2 R20.2 R21.2 R29.2 R33.1 R47.2 R48.2 TP45.1 U1.13 U1.14 U3.2 U4.5 U5.1 U7.13 U7.14 U9.5 | length 671.6
  Top Layer w10: C10.2@853.82,2465 853.82,2520.91 U5.1@856.14,2523.23 ; U3.2@930.08,4295.43 994.57,4295.43 C3.2@995,4295 ; C36.2@1840,2415 1840,2459.53 1863.52,2483.05 1864.82,2483.05 1941.42,2559.65 L3.1@1941.42,2600 ; U4.5@1870,2100.55 1850,2120.55 1850,2170 C5.1@1885,2205 ; C12.2@2090,4454.41 2090,4372.91 U7.14@2091.14,4371.77 ; U1.13@2131.18,213.86 U1.14@2156.77,213.86 2204.05,213.86 2229.02,238.82 C1.2@2230,238.82
5V: C2.2 C4.2 C9.2 C11.2 C30.1 C31.1 C32.2 F2.2 F3.2 F4.2 J6.1 J10.1 L2.2 R2.2 R10.2 R14.2 R15.2 R16.2 R30.2 R34.2 R35.2 R37.2 R38.2 TP46.1 U2.8 U3.19 U5.14 U6.8 | length 2017.8
  Top Layer w10: F2.2@625,2340 C9.2@625,2465 625,2522.09 U5.14@623.86,2523.23 642.56,2523.23 664.35,2501.44 664.35,2482.93 682.28,2465 R10.2@715,2465 ; C4.2@626.18,4295 626.61,4295.43 U3.19@689.92,4295.43 ; F3.2@900,4145 900,4148.31 F3.2@916.69,4165 ; F4.2@918.31,4895 918.31,4871.57 967.65,4822.23 967.65,4723.44 941.18,4696.97 R2.2@941.18,4695 ; v2@2152.65,4437.65 v2(2145,4430) 2198.82,4430 R14.2@2200,4431.18 2199.02,4431.18 R14.2@2188.27,4441.93 ; v2(2165,4190) 2165,4182.32 2190.59,4156.73 C11.2@2190.59,4125 2230.98,4125 2300,4194.02 R15.2@2300,4195 2310.75,4205.75 2310.75,4235.28 2314,4238.54 2314,4291.63 2360.76,4338.39 U6.8@2411.69,4338.39 ; C2.2@2230,475 2230.98,475 2241.73,464.25 2241.73,438.69 2382.51,297.91 2382.51,259.18 2383.33,260 2430,260 2463.36,293.36 2526.35,293.36 2559.71,326.73 2559.71,384.71 J10.1@2615,440
  Bottom Layer w10: v2(2145,4430) 2145,4419.18 2165,4399.18 v2(2165,4190)
+3.3V: C21.2 U8.26
AGND: C3.1 C4.1 C5.2 C7.1 C9.1 C10.1 C15.1 C16.1 C17.1 C18.1 C19.1 C20.1 C21.1 C22.1 C25.1 C28.1 C29.1 C30.2 C31.2 C34.2 C35.2 C36.1 C37.1 C38.1 C39.1 C40.1 D2.2 D4.2 D5.2 D6.2 J5.P3-1 J5.P3-2 J5.P3-3 J5.P3-4 J5.P3-5 J5.P3-6 J5.P4-1 J5.P4-2 J5.P4-3 J5.P4-4 J5.P4-5 J5.P4-6 J6.3 J7.3 J8.3 J10.3 J11.3 J12.3 LED6.1 LED7.1 Q1.S Q2.S Q9.1 Q10.3 Q11.S Q12.S R1.1 R4.1 R12.1 R18.1 R22.3 R23.3 R24.3 R25.2 R26.1 R31.1 R32.1 R43.2 R49.1 R51.1 R53.1 R55.1 TP42.1 TP43.1 TP44.1 TP47.1 TP48.1 TP50.1 U3.11 U4.2 U5.5 U5.7 U5.10 U8.2 U8.27 U8.35 U8.43 U9.2 | length 3925.9
  Top Layer w10: J11.3@390,4330 J11.3@392.98,4327.02 ; C9.1@573.82,2465 465,2465 429.78,2500.22 429.78,2633.2 387.98,2675 387.98,2717.02 J8.3@385,2720 ; v2(575,4245) C4.1@575,4295 ; R12.1@676.18,2745 676.18,2745.98 649.43,2772.73 596.51,2772.73 579.24,2790 455,2790 J8.3@385,2720 ; U3.11@689.92,4500.16 690,4500.24 v2(690,4545) 699.53,4545 762.4,4607.87 Q1.S@762.4,4616.73 ; U5.5@856.14,2625.59 860,2629.45 885.24,2629.45 894.7,2638.91 894.7,2663.45 885.24,2672.91 860,2672.91 U5.7@856.14,2676.77 ; v2(860,2720) 860,2680.63 U5.7@856.14,2676.77 ; C10.1@905,2465 905,2515 v2(965,2575) ; Q2.S@972.6,2679.13 970.24,2676.77 U5.7@856.14,2676.77 ; C3.1@1046.18,4295 v2(1095,4295) ; C36.1@1840,2344.13 1899.13,2285 2404.45,2285 2514.02,2394.57 C37.1@2515,2394.57 2515,2110 2530,2095 2630,2095 2665,2060 2665,2005 J7.3@2600,1940 ; U4.2@1906.2,2011.2 U4.2@1907.4,2010 1907.4,2018.86 1948.54,2060 1950.32,2060 1975,2084.68 1975,2165.2 1936.18,2204.02 C5.2@1936.18,2205 1966.18,2235 1991.18,2235 C7.1@2010,2216.18 ; R1.1@2411.1,150 2525,150 J10.3@2615,240 ; J8.3@385,2720 415,2720 417.98,2722.98 430,2722.98 477.88,2770.86 499.14,2770.86 544.88,2725.12 544.88,2679.33 594.76,2629.45 620,2629.45 U5.10@623.86,2625.59 714.41,2625.59 765.59,2676.77 U5.7@856.14,2676.77
CAL: J3.2 R26.2 R40.1 U8.34
Chan_A: J4.39 TP2.1 U1.6 | length 287.9
  Top Layer w10: TP2.1@1810,315 1840.04,345.04 1952.96,345.04 2024.96,417.04 2024.96,442.28 U1.6@2028.82,446.14
Chan_A_Raw: J10.5 U2.3 | length 229.7
  Top Layer w10: U2.3@2332.2,421.69 2336.06,417.83 2336.06,395.55 2351.61,380 2420,380 2460,340 J10.5@2515,340
Chan_B: J4.38 TP3.1 U1.8 | length 193.7
  Top Layer w10: TP3.1@1810,215 2002.09,215 U1.8@2003.23,213.86
Chan_B_Raw: J10.6 U2.6 | length 224.1
  Top Layer w10: U2.6@2332.2,258.31 2336.06,254.45 2336.06,232.16 2353.22,215 2395,215 2420,240 J10.6@2515,240
CS_DRV: J3.8 R19.1 U8.32
CS_SD: J1.2 J3.11 R5.1 R41.2
CS_TEMP: J3.32 R20.1 U9.1
Enable: R18.2 R42.1 TP31.1 U8.33
EXT_SPI_CLK: J8.4 U5.13 | length 150.8
  Top Layer w10: J8.4@485,2520 537.43,2520 566.25,2548.82 U5.13@623.86,2548.82
EXT_SPI_MISO: J8.6 U5.11 | length 192.3
  Top Layer w10: J8.6@485,2720 485,2713.62 594.76,2603.86 620,2603.86 U5.11@623.86,2600
EXT_SPI_MOSI: J8.5 U5.12 | length 157.7
  Top Layer w10: J8.5@485,2620 485.95,2619.05 530,2619.05 574.64,2574.41 U5.12@623.86,2574.41
"Fan Enable": J3.31
GHA: Q4.G TP32.1 U8.8 | length 1822.9
  Top Layer w10: U8.8@1573.08,5739.84 1628.24,5795 2225.51,5795 2378.34,5947.83 2378.34,6787.07 2378.34,6816 2405.84,6843.49 2415,6852.66 Q4.G@2415,6864.17
GHB: Q5.G TP33.1 U8.17 | length 1319.5
  Top Layer w10: Q5.G@1275,6864.17 1277.56,6861.62 1277.56,6832.44 1295,6815 1450,6815 1460,6805 1460,6615.25 1410,6565.25 1410,5756.76 U8.17@1426.92,5739.84
GHC: Q3.G TP34.1 U8.18 | length 1649.3
  Top Layer w10: Q3.G@735,6864.17 735,6855 694,6814 694,6109.88 1015.88,5788 1350.92,5788 U8.18@1413,5725.92
GLA: Q7.G TP38.1 U8.10 | length 1589.1
  Top Layer w10: U8.10@1545.24,5767.67 1604.56,5827 2212.25,5827 2345.69,5960.43 2345.69,6548.25 2265,6628.94 Q7.G@2265,6635.83
GLB: Q8.G TP39.1 U8.15 | length 1139
  Top Layer w10: U8.15@1454.76,5767.67 1455,5767.91 1443,5779.91 1443,6553 1560,6670 1697.72,6670 1725,6642.72 Q8.G@1725,6635.83
GLC: Q6.G TP40.1 U8.20 | length 1459.3
  Top Layer w10: Q6.G@585,6635.83 585,6630 662,6553 662,6096.63 1002.63,5756 1327.24,5756 U8.20@1385.16,5698.08
GND: C1.1 C2.1 C6.1 C11.1 C12.1 J1.6 J1.Shield J3.20 J3.22 J4.20 R17.1 U1.7 U1.12 U2.4 U6.4 U7.7 U7.12 | length 307.5
  Top Layer w10: U1.12@2105.59,213.86 2109.45,217.72 2109.45,242.96 2145.74,279.25 2219.25,279.25 C1.1@2230,290 ; C2.1@2230,526.18 2230.98,526.18 2269,488.16 2269,475.05 2306.61,437.44 U2.4@2306.61,421.69
"Hall A": J3.19 TP18.1 U7.3 | length 482.2
  Top Layer w10: TP18.1@1645,4230 1677.48,4230 1728,4280.52 1728,4313 1830,4415 1895,4415 1910,4400 1910,4346.49 1887.96,4324.45 1862.72,4324.45 U7.3@1858.86,4320.59
"Hall B": J3.13 TP19.1 U7.6 | length 572.5
  Top Layer w10: TP19.1@1645,4330 1675.04,4360.04 1748.78,4360.04 1823.74,4435 1897.63,4435 1956,4376.63 1956,4280.09 1919.73,4243.82 1879.19,4243.82 U7.6@1875.34,4247.68
"Hall C": J3.12 TP29.1 U7.8 | length 640
  Top Layer w10: TP29.1@1650,4430 1671,4451 1914,4451 1975,4390 1975,4230 1986.77,4218.23 U7.8@2091.14,4218.23
Hall_A_Raw: J6.4 R14.1 U6.1 | length 379.1
  Top Layer w10: R14.1@2200,4380 2200.98,4380 2228.7,4352.28 2228.7,4342.24 2232.56,4338.39 U6.1@2248.31,4338.39 2250,4340.08 2250,4370 2275,4395 J6.4@2515,4395
Hall_B_Raw: J6.5 R15.1 U6.3 | length 489
  Top Layer w10: U6.3@2248.31,4287.2 U6.3@2252.17,4291.06 ; R15.1@2248.82,4195 2248.82,4195.98 2295,4242.16 2295,4265 2276.65,4283.35 2259.88,4283.35 U6.3@2252.17,4291.06 ; J6.5@2515,4295 2470,4340 2470,4364.14 2464.14,4370 2353.39,4370 2274.45,4291.06 U6.3@2252.17,4291.06
Hall_C_Raw: J6.6 R16.1 U6.6 | length 247
  Top Layer w10: U6.6@2411.69,4287.2 2457.8,4287.2 2505.43,4239.57 2505.43,4204.57 J6.6@2515,4195 R16.1@2430,4195
"Hi A": J3.40 TP9.1 U8.37
"Hi B": J3.38 TP11.1 U8.39
"Hi C": J3.36 TP13.1 U8.41
Index: J4.40 TP1.1 U1.3 | length 502
  Top Layer w10: TP1.1@1810,415 1842.48,415 1872.52,445.04 1872.52,467.52 1975,570 2099.73,570 2116,553.73 2116,507.58 2105.59,497.17 U1.3@2105.59,446.14
Index_Raw: J10.4 U2.1 | length 147.5
  Top Layer w10: U2.1@2383.39,421.69 2383.39,435.82 2387.24,439.67 2514.67,439.67 J10.4@2515,440
IO_1: J11.4 U3.20 | length 262.3
  Top Layer w10: J11.4@490,4130 535,4130 599.21,4194.21 599.21,4201.77 667.28,4269.84 U3.20@689.92,4269.84
IO_1_RAW: J3.26 U3.1
IO_2: J11.5 U3.18 | length 261.5
  Top Layer w10: J11.5@490,4230 527.13,4267.13 527.13,4295.17 561.96,4330 635,4330 642.27,4322.73 688.21,4322.73 U3.18@689.92,4321.02
IO_2_RAW: J3.27 U3.3
IO_3: J11.6 U3.17 | length 206.8
  Top Layer w10: J11.6@490,4330 506.61,4346.61 U3.17@689.92,4346.61
IO_3_RAW: J3.28 U3.4
IO_4: J12.4 U3.16 | length 277.7
  Top Layer w10: J12.4@490,4550 490,4542.95 656.89,4376.06 686.06,4376.06 U3.16@689.92,4372.2
IO_4_RAW: J3.29 U3.5
IO_5: J12.5 U3.15 | length 352.1
  Top Layer w10: J12.5@490,4650 561.29,4578.71 561.29,4497.25 656.88,4401.65 686.06,4401.65 U3.15@689.92,4397.8
IO_5_RAW: J3.30 U3.6
IO_6: J12.6 U3.14 | length 426.5
  Top Layer w10: J12.6@490,4750 577.29,4662.71 577.29,4506.84 656.88,4427.24 686.06,4427.24 U3.14@689.92,4423.39
IO_6_RAW: J4.37 U3.7
IO_7: J10.2 U3.13
IO_7_RAW: J4.36 U3.8
IO_8: J8.2 U3.12
IO_8_RAW: J4.35 U3.9
"Low A": J3.39 TP10.1 U8.38
"Low B": J3.37 TP12.1 U8.40
"Low C": J3.35 TP14.1 U8.42
NetC7_2: C7.2 R9.2 U4.3 | length 259.7
  Top Layer w10: U4.3@1944.8,2010 1944.8,2018.86 2010,2084.05 C7.2@2010,2165 2030,2145 R9.2@2079.41,2145
NetC8_1: C8.1 R8.2 R9.1 | length 164.1
  Top Layer w10: C8.1@2131.18,2065 2131.18,2144.41 R9.1@2130.59,2145 R8.2@2214.41,2145
NetC13_2: C13.2 U8.5
NetC14_1: C14.1 U8.3
NetC14_2: C14.2 U8.4
NetC20_2: C20.2 U8.36
NetC23_1: C23.1 D2.1 L1.1 U8.45
NetC23_2: C23.2 U8.44
NetC24_1: C24.1
NetC24_2: C24.2 L2.1
NetC32_1: C32.1 R30.1 R32.2
NetC33_2: 
NetC37_2: C37.2 J7.1 L3.2 | length 621.3
  Top Layer w10: L3.2@2368.58,2600 2368.58,2559.65 2418.23,2510 2470.43,2510 C37.2@2515,2465.43 2520.43,2460 2580,2460 2600,2440 J7.1@2600,2140
NetD1_2: D1.2 R25.1 | length 151.4
  Top Layer w10: D1.2@1899.02,7010 1899.02,6998.5 1950,6947.52 1950,6880.59 R25.1@1950.59,6880
NetF2_1: F2.1 J8.1 | length 199.3
  Top Layer w10: J8.1@385,2520 385,2475 398.11,2461.89 398.11,2373.58 F2.1@431.69,2340
NetF3_1: F3.1 J11.1 | length 376.8
  Top Layer w10: J11.1@390,4130 455,4065 525,4065 605,4145 F3.1@706.69,4145
NetF4_1: F4.1 J12.1 | length 586.3
  Top Layer w10: J12.1@390,4550 440,4600 440,4785 550,4895 F4.1@725,4895
NetJ1_1: J1.1 R7.1
NetJ1_8: J1.8 R6.1
NetLED1_1: LED1.1 Q1.D | length 149.1
  Top Layer w10: Q1.D@725,4725 725,4733.86 731.81,4740.67 740.67,4740.67 765,4765 LED1.1@852.32,4765
NetLED1_2: LED1.2 R2.1 | length 88.6
  Top Layer w10: R2.1@890,4695 902.72,4707.72 902.72,4730.75 935,4763.03 LED1.2@935,4765
NetLED2_1: LED2.1 Q2.D | length 123
  Top Layer w10: Q2.D@1010,2570.87 1010,2562.01 1051.34,2520.67 LED2.1@1051.34,2465
NetLED2_2: LED2.2 R10.1 | length 232.6
  Top Layer w10: R10.1@766.18,2465 800,2465 835,2430 935.63,2430 968.66,2463.03 LED2.2@968.66,2465
NetLED3_1: LED3.1 Q10.2
NetLED3_2: LED3.2 R33.2
NetLED4_1: LED4.1 Q9.6
NetLED4_2: LED4.2 R38.1
NetLED5_1: LED5.1 Q12.D
NetLED5_2: LED5.2 R34.1
NetLED6_2: LED6.2 R35.1
NetLED7_2: LED7.2 R36.1
NetLED8_1: LED8.1 Q11.D
NetLED8_2: LED8.2 R37.1
NetLED9_1: LED9.1 R43.1
NetLED9_2: LED9.2 Q9.4
NetQ1_G: Q1.G R3.2 | length 226.8
  Top Layer w10: Q1.G@687.6,4616.73 687.6,4625.59 710.41,4648.4 811.81,4648.4 813.48,4646.73 879.25,4646.73 890,4635.98 R3.2@890,4635
NetQ2_G: Q2.G R13.2 | length 224.6
  Top Layer w10: R13.2@866.18,2770 866.18,2769.02 876.93,2758.27 941.5,2758.27 1004.97,2694.8 1040.59,2694.8 1047.4,2687.99 Q2.G@1047.4,2679.13
NetQ6_S: Q6.S R24.1
NetQ7_S: Q7.S R22.1
NetQ8_S: Q8.S R23.1
NetQ9_2: Q9.2 R40.2
NetQ9_5: Q9.5 R39.2
NetQ10_1: Q10.1 R41.1
NetR1_2: R1.2 U1.1 U1.4 U1.10 | length 1028.9
  Top Layer w10: v2(1945,465) 1970,490 2061.38,490 2076.14,475.24 2076.14,450 U1.4@2080,446.14 v2(2080,525) ; v2(2020,345) 2066.78,298.22 2066.78,264.93 2058.27,256.42 2058.27,217.72 U1.10@2054.41,213.86 2058.27,210 2058.27,184.76 2093.03,150 2289.27,150 2298.9,159.63 R1.2@2298.9,150 ; U1.1@2152.91,450 U1.1@2156.77,446.14 2158.39,447.76 2158.39,523.39 v2(2160,525)
  Bottom Layer w10: v2(1945,465) 1945,420 v2(2020,345) ; v2(2080,525) v2(2160,525)
NetR3_1: R3.1 R4.2 U3.10 | length 172.6
  Top Layer w10: U3.10@930.08,4500.16 930.08,4538.94 890,4579.02 900.75,4589.76 900.75,4593.58 941.18,4634.02 R3.1@941.18,4635
NetR12_2: R12.2 R13.1 U5.8 | length 298.1
  Top Layer w10: R12.2@625,2745 625,2677.91 U5.8@623.86,2676.77 692.66,2676.77 749.15,2733.27 779.25,2733.27 R13.1@815,2769.02
NetR17_2: R17.2 U7.1 U7.4 U7.10 | length 878
  Top Layer w10: U7.1@1858.86,4371.77 1810.86,4371.77 1744,4304.91 1744,4271 1765.86,4249.14 1790.05,4249.14 1816,4275.09 1816,4277.38 1829.76,4291.14 1855,4291.14 U7.4@1858.86,4295 v2(1920,4295) ; R17.2@1912.2,4045 1917.2,4050 v2(1990,4050) ; v2(2025,4270) 2025.3,4269.7 2090.85,4269.7 U7.10@2091.14,4269.41
  Bottom Layer w10: v2(1920,4295) 1993.43,4295 2018.43,4270 v2(2025,4270) 2025,4085 v2(1990,4050)
NetR27_1: 
NetR28_2: R28.2 U8.48
NetR29_1: R29.1 R31.2 U8.1
NetU1_2: U1.2 U2.7 | length 332.3
  Top Layer w10: U1.2@2131.18,446.14 2135.04,442.28 2135.04,417.04 2152.08,400 2190,400 2250,340 2298.39,340 2353.94,284.45 2353.94,262.17 U2.7@2357.8,258.31
NetU1_5: U1.5 U2.5 | length 370.6
  Top Layer w10: U1.5@2054.41,446.14 2058.27,442.28 2058.27,417.04 2092.94,382.37 2185,382.37 2243.37,324 2285,324 2306.61,302.39 U2.5@2306.61,258.31
NetU1_9: U1.9 U2.2 | length 532.9
  Top Layer w10: U1.9@2028.82,213.86 2029.41,214.45 2029.41,279.41 v2(2030,280) ; v2(2305,500) 2353.94,451.06 2353.94,425.55 U2.2@2357.8,421.69
  Bottom Layer w10: v2(2030,280) 2035,285 2090,285 v2(2305,500)
NetU6_2: U6.2 U7.9 | length 185.7
  Top Layer w10: U7.9@2091.14,4243.82 2136.71,4243.82 2205.69,4312.8 U6.2@2248.31,4312.8
NetU6_5: U6.5 U7.5 | length 953
  Top Layer w10: U7.5@1858.86,4269.41 1855,4265.55 1829.76,4265.55 1795,4230.79 1795,4145 1830,4110 2005,4110 2050,4065 2295,4065 2346,4116 2346,4211.67 2395.94,4261.61 U6.5@2411.69,4261.61
NetU6_7: U6.7 U7.2 | length 1020.5
  Top Layer w10: v2(1780,4290) 1780,4292.56 1829.76,4342.32 1855,4342.32 U7.2@1858.86,4346.18 ; v2(1840,4155) 1846.57,4155 1871.57,4130 2010,4130 2050,4090 2260,4090 2330,4160 2330,4285 2357.8,4312.8 U6.7@2411.69,4312.8
  Bottom Layer w10: v2(1780,4290) 1780,4215 v2@1835,4160
nFault: J3.33 J4.33 R21.1 R39.1 TP30.1 TP41.1 U8.28
PHASE_A: J9.1 J9.2 J9.3 J9.4 J9.5 J9.6 J9.7 J9.8 J9.9 J9.10 J9.11 J9.12 Q4.S Q7.D R50.2 TP35.1 U8.9 | length 1830.7
  Top Layer w10: U8.9@1559.16,5753.75 1616.4,5811 2218.88,5811 2361.69,5953.8 2361.69,6693.31 2348.23,6706.77 2258.82,6706.77 Q7.D@2190,6775.59
PHASE_B: D1.1 J9.13 J9.14 J9.15 J9.16 J9.17 J9.18 J9.19 J9.20 J9.21 J9.22 J9.23 J9.24 Q8.D R52.2 TP36.1 U8.16 | length 1201.1
  Top Layer w10: U8.16@1440.84,5753.75 1427,5767.6 1427,6559.63 1505,6637.63 1505,6769.14 1510.86,6775 1649.41,6775 Q8.D@1650,6775.59
PHASE_C: J9.25 J9.26 J9.27 J9.28 J9.29 J9.30 J9.31 J9.32 J9.33 J9.34 J9.35 J9.36 Q6.D R54.2 TP37.1 U8.19 | length 1692.7
  Top Layer w10: Q6.D@510,6775.59 555.59,6730 671,6730 678,6723 678,6103.25 1009.25,5772 1339.08,5772 U8.19@1399.08,5712
SA_N: R22.4 U8.12 | length 1520.2
  Top Layer w10: U8.12@1517.4,5795.51 1580.89,5859 2199,5859 2313.69,5973.69 2313.69,6195 2286.69,6222 2035,6222 2009.72,6196.72 2009.72,6140.94 R22.4@1997.2,6128.43 R22.4@1997.2,6158.15
SA_P: R22.2 U8.11 | length 1558.5
  Top Layer w10: U8.11@1531.32,5781.59 1592.73,5843 2205.63,5843 2329.69,5967.06 2329.69,6201.63 2293.31,6238 2035,6238 2009.72,6263.28 2009.72,6319.06 R22.2@1997.2,6331.57 R22.2@1997.2,6301.85
SB_N: R23.4 U8.13 | length 547.6
  Top Layer w10: U8.13@1482.6,5795.51 1475,5803.11 1475,6185 1506.14,6216.14 1523.86,6216.14 1535,6205 1535,6130.63 R23.4@1537.2,6128.43
SB_P: R23.2 U8.14 | length 586.4
  Top Layer w10: U8.14@1468.68,5781.59 1459,5791.28 1459,6191.63 1535,6267.63 1535,6329.37 R23.2@1537.2,6331.57
SC_N: R24.4 U8.22 | length 1372.1
  Top Layer w10: R24.4@337.2,6128.43 349.72,6140.94 349.72,6191.72 378,6220 590,6220 630,6180 630,6083.37 989.37,5724 1303.56,5724 U8.22@1357.33,5670.24
SC_P: R24.2 U8.21 | length 1388.6
  Top Layer w10: R24.2@337.2,6331.57 349.72,6319.06 349.72,6268.28 382,6236 596.63,6236 646,6186.63 646,6090 996,5740 1315.4,5740 U8.21@1371.25,5684.16
SOA: J3.23 TP8.1 U8.25
SOB: J3.24 TP7.1 U8.24
SOC: J3.25 TP6.1 U8.23
SPI_1_CLK: J1.5 J3.34 J4.32 TP20.1 TP26.1
SPI_1_MISO: J1.7 J3.9 J4.14 R47.1 TP21.1 TP28.1
SPI_1_MOSI: J1.3 J3.10 J4.15 TP22.1 TP27.1
SPI_CLK: J3.7 TP15.1 U5.2 U8.31 U9.3
SPI_MISO: J3.14 R48.1 TP17.1 U5.4 U8.29 U9.4
SPI_MOSI: J3.15 TP16.1 U5.3 U8.30
Throttle: C8.2 J3.6 R11.2 TP5.1 U4.1 U4.4 | length 531.2
  Top Layer w10: U4.4@1944.8,2100.55 1944.8,2091.69 1923.11,2070 1895,2070 1870,2045 U4.1@1870,2010 1870,1985 1885,1970 1950.87,1970 2034.14,2053.27 C8.2@2069.25,2053.27 ; R11.2@2057.8,1945 2069.25,1956.46 C8.2@2069.25,2053.27 ; C8.2@2080,2064.02 C8.2@2069.25,2053.27
"Throttle Raw": J7.2 R8.1 R11.1 TP4.1 | length 679.7
  Top Layer w10: R11.1@2170,1945 2240.35,2015.35 2227.85,2027.85 2215.71,2040 TP4.1@2240,2040 ; TP4.1@2245,2010 2265.59,2030.59 R8.1@2265.59,2144.02 ; R8.1@2265.59,2145 R8.1@2265.59,2144.02 ; J7.2@2600,2040 2370.59,2040 2277.32,2133.27 2276.34,2133.27 R8.1@2265.59,2144.02
V_BATT: C17.2 C18.2 C19.2 Q3.D Q4.D Q5.D
VBATT: C13.1 C15.2 C16.2 C25.2 C28.2 C34.1 C35.1 J5.P1-1 J5.P1-2 J5.P1-3 J5.P1-4 J5.P1-5 J5.P1-6 J5.P2-1 J5.P2-2 J5.P2-3 J5.P2-4 J5.P2-5 J5.P2-6 R28.1 R36.2 R49.2 TP49.1 U8.6 U8.7 U8.47
Voltage_A: C38.2 D4.1 J4.27 R50.1 R51.2 TP25.1
Voltage_B: C39.2 D5.1 J4.28 R52.1 R53.2 TP24.1
Voltage_C: C40.2 D6.1 J4.29 R54.1 R55.2 TP23.1
pads on no net: J3.3 J3.4 J3.5 J3.16 J3.17 J3.18 J3.21 J4.1 J4.2 J4.3 J4.4 J4.5 J4.6 J4.7 J4.8 J4.9 J4.10 J4.11 J4.12 J4.13 J4.16 J4.17 J4.18 J4.19 J4.21 J4.22 J4.23 J4.24 J4.25 J4.26 J4.30 J4.31 J4.34 J5.None J6.2 J9.None J11.2 J12.2 Q3.S Q5.S Q11.G R42.2 U1.11 U5.6 U5.9 U7.11 U8.46 U8.49
copper on no net:
  other v1: 1500,5502.51 1469.38,5533.13 1530.62,5533.13 1438.75,5563.75 1500,5563.75 1561.25,5563.75 1408.13,5594.38 1469.38,5594.38 1530.62,5594.38 1591.87,5594.38 1377.51,5625 1438.75,5625 1500,5625 1561.25,5625 1622.49,5625 1408.13,5655.62 1469.38,5655.62 1530.62,5655.62 1591.87,5655.62 1438.75,5686.25 1500,5686.25 1561.25,5686.25 1469.38,5716.87 1530.62,5716.87 1500,5747.49

## Polygon pours and split planes (outlines as drawn)
VBATT on Top Layer "Top Layer-VBATT" (solid, pour order 24): 2390,6815 2410,6835 2660,6835 2685,6810 2685,6245 2660,6220 2425,6220 2390,6255
PHASE_A on Top Layer "Top Layer-PHASE_A" (solid, pour order 4): 2100,6685 2365,6685 2390,6710 2390,6815 2420,6845 2585,6845 2605,6865 2605,7445 2560,7490 1720,7490 1700,7470 1700,7130 1715,7115 1760,7115 1800,7075 1995,7075 2025,7045 2025,6760
NetQ6_S on Top Layer "Top Layer-NetQ6_S" (solid, pour order 22): 565,6614.17 565,6660 555,6670 498,6670 355,6670 295,6610 295,6450 365,6380 365,6270 390,6245 640,6245 650,6255 650,6550 590,6610 570,6610
AGND on Top Layer "Top Layer-AGND" (solid, pour order 20): 1375,6205 1395,6185 1395,5820 1375,5800 1025,5800 705,6120 705,6190 720,6205
VBATT on Top Layer "Top Layer-VBATT 1" (solid, pour order 18): 705,6230 720,6215 1385,6215 1400,6230 1400,6580 1450,6630 1450,6795 1440,6805 725,6805 705,6785
PHASE_B on Top Layer "Top Layer-PHASE_B" (solid, pour order 8): 1215,6815 1450,6815 1575,6690 1810,6690 1840,6720 1840,7030 1744.8,7125.2 1719.22,7125.2 1690,7154.42 1690,7475 1675,7490 1325,7490 1310,7475 1310,7180 1245,7115 1215,7115 1190,7090 1190,6840
PHASE_C on Top Layer "Top Layer-PHASE_C" (solid, pour order 0): 650,6690 690,6730 690,6800 720,6830 1105,6830 1180,6905 1180,7080 1215,7115 1230,7115 1310,7195 1310,7475 1295,7490 440,7490 395,7445 395,6725 430,6690
NetQ7_S on Top Layer "Top Layer-NetQ7_S" (solid, pour order 16): 2025,6385 2025,6270 2045,6250 2325,6250 2335,6260 2335,6545 2270,6610 2245,6610 2240,6615 2240,6665 2230,6675 1950,6675 1915,6640 1915,6420 1935,6400 2010,6400
NetQ8_S on Top Layer "Top Layer-NetQ8_S" (solid, pour order 12): 1950,6245 1960,6255 1960,6380 1945,6395 1925,6395 1905,6415 1905,6585 1885,6605 1700,6605 1695,6610 1695,6655 1690,6660 1565,6660 1455,6550 1455,6405 1470,6390 1560,6390 1565,6385 1565,6270 1590,6245
AGND on Top Layer "Top Layer-AGND 1" (solid, pour order 10): 1565,6075 1565,6210 1585,6230 1915,6230 1965,6180 1965,6070 1975,6060 2040,6060 2050,6070 2050,6185 2070,6205 2275,6205 2295,6185 2295,5980 2190,5875 1520,5875 1490,5905 1490,6055 1505,6070 1560,6070
VBATT on Power "Power-VBATT" (solid, pour order 26): 2760,6620 3000,6380 3000,4725 2975,4700 2430,4700 2225,4905 2225,5250 1810,5665 0,5665 0,6480 140,6620

## Keep-outs
Top Layer:
  region: 150,7350
Keep-Out Layer:
  circle w10: c2800,7300 r187.5
  circle w10: c200,7300 r187.5

## Other copper
Power:
  text "Throttle Input / And Filter" at 2515,2620 h60

## Silkscreen, mask and mechanical layers (free items; w line width, h text height)
Mechanical 1:
  the board outline again, w0

## Text inside footprints (layer, text, board x,y; h text height)
J3: Mechanical 1 "J1" at 2424.21,1177.57 h30 r270; Mechanical 1 "J1" at 724.21,1177.57 h30 r270
J4: Mechanical 1 "J1" at 2419.21,3437.57 h30 r270; Mechanical 1 "J1" at 719.21,3437.57 h30 r270
J5: Top Overlay "1" at 2632.12,5016.53 h73.82 r90
J6: Mechanical 1 "J1" at 2827,4312.57 h30 r270
J7: Mechanical 1 "J1" at 2812,2057.57 h30 r270
J8: Mechanical 1 "J1" at 173,2602.43 h30 r90
J9: Top Overlay "1" at 2040.33,7125.47 h73.82 r180
J10: Mechanical 1 "J1" at 2827,357.57 h30 r270
J11: Mechanical 1 "J1" at 178,4212.43 h30 r90
J12: Mechanical 1 "J1" at 178,4632.43 h30 r90